# EAGLE board ZX_UNO_0_14 (EAGLE 6.5.0)
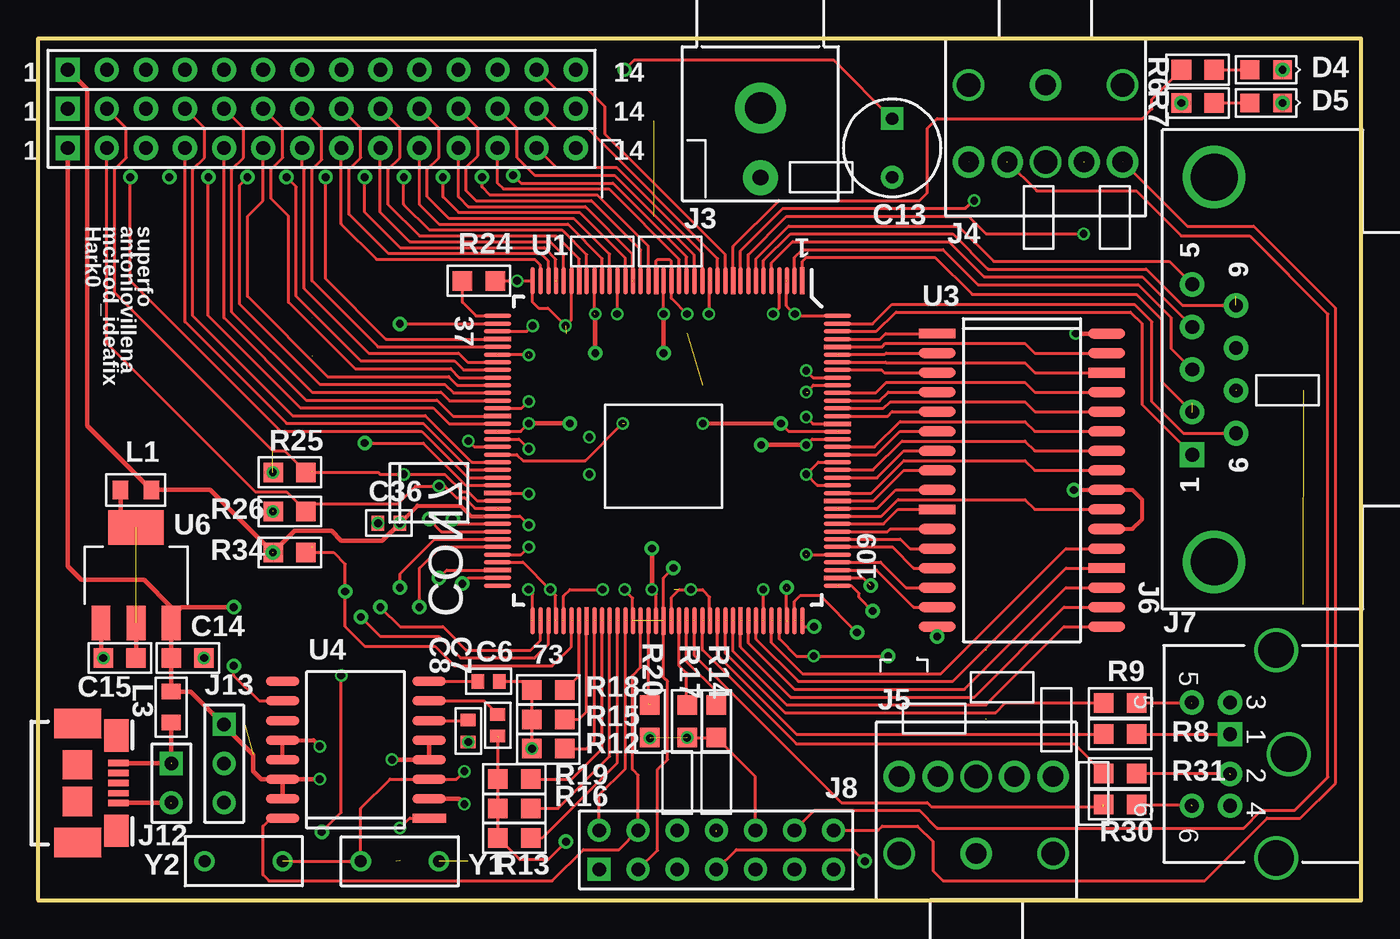
[diagram p0: board, top side]
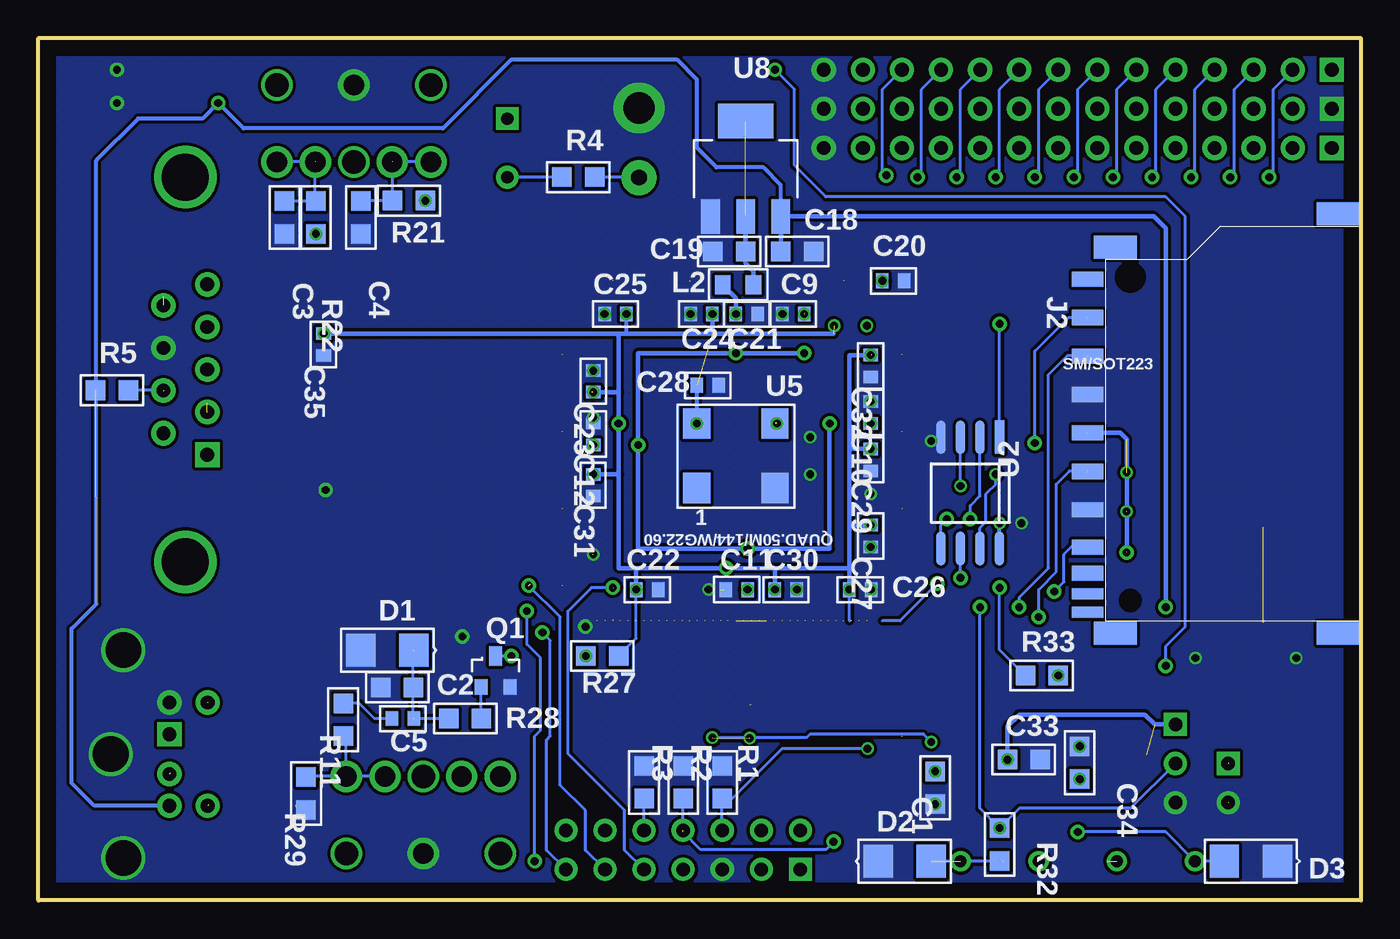
[diagram p1: board, bottom side, seen from below]

Size 85.98 x 56.01 mm. Coordinates in mm from the lower left corner, seen from the top.
Outline: 0,0 85.98,0 85.98,56.01 0,56.01 0,0
Copper layers (1*16): Top 0.035mm / dielectric 1.5mm / Bottom 0.035mm
Design rules "ZX_UNO_0_14": minimum track width 10mil, minimum drill 24mil, track to track 8mil, track to pad 8mil, pad to pad 8mil, via to via 8mil, smd to smd 8mil, copper to edge 40mil, drill to drill 8mil, minimum pad ring 0mil, minimum via ring 0mil, stop-mask expansion 4mil, vias tented up to drill 0mil, thermal gap 10mil

## Footprints (pad centres in the part's own frame; a part is rotated, then mirrored left to right if it is on the bottom)
SM/C_0805_3PRIMARY = smd 1.27 x 1.27: 1 0,0; 2 2.134,0
SM/C_0805_2PRIMARY = smd 1.27 x 1.27: 1 0,0; 2 -2.134,0
SM/C_0603_1PRIMARY = smd 0.813 x 0.965: 1 0,0; 2 1.422,0
SM/C_0603_2PRIMARY = smd 0.813 x 0.965: 1 0,0; 2 1.422,0
CYL/D.250/LS.150/.031_1PRIMARY = drill 0.787 pad 1.473 square: 1 0,0 | drill 0.787 pad 1.473: 2 3.81,0
SM/C_0805_1PRIMARY = smd 1.27 x 1.27: 1 0,0; 2 2.134,0
SM/DO213AA_21_1PRIMARY = smd 1.905 x 2.134: 1 0,0; 2 -3.454,0
SM/D_0805_21_1PRIMARY = smd 1.219 x 1.219: 1 0,0; 2 -2.134,0
MICRO_USB_609-4613-1-ND_1PRIMARY = smd 0.406 x 1.346: 1 -1.295,2.667; 2 -0.66,2.667; 3 0,2.667; 4 0.66,2.667; 5 1.295,2.667 | smd 1.905 x 3.048: 6 -3.861,0; 9 3.861,0 | smd 1.905 x 1.905: 7 -1.194,0; 8 1.194,0 | smd 2.108 x 1.6: 10 -3.099,2.54; 11 3.099,2.54
SD_101-00708-64-ND_1PRIMARY = smd 0.991 x 2.057: 1 -6.883,-2.794; 2 -4.369,-2.794; 3 -1.88,-2.794; 4 0.61,-2.794; 5 3.124,-2.794; 6 5.613,-2.794; 7 8.052,-2.794; 8 9.728,-2.794; 9 -9.373,-2.794 | smd 0.711 x 2.057: 10 11.074,-2.794; 11 12.268,-2.794 | drill 1.092 pad 1.092: 12 11.506,0 | drill 1.6 pad 1.6: 13 -9.5,0 | smd 1.499 x 2.794: 14 13.64,-0.991; 15 -11.455,-0.991; 16 13.64,13.513; 17 -13.64,13.513
RCA_JACK_RCJ-04X_1PRIMARY = drill 1.016 pad 2.286: 1 0,-4.521 | drill 2.032 pad 3.302: 2 0,0
AUDIO_JACK_STX-3120_1PRIMARY = drill 1.321 pad 2.032: 1 0,0; 2 5.004,-5.004; 3 2.489,-5.004; 4 -2.489,-5.004; 5 -5.004,-5.004 | drill 1.524 pad 2.032: 6 -5.004,0; 7 5.004,0; 8 0,-5.004
DSUB/RP.318/TM/9_1PRIMARY = drill 0.889 pad 1.6 square: 1 0,0 | drill 0.889 pad 1.6: 2 2.769,0; 3 5.537,0; 4 8.306,0; 5 11.074,0; 6 1.397,-2.845; 7 4.166,-2.845; 8 6.934,-2.845; 9 9.703,-2.845 | drill 3.048 pad 4.064: 10 -6.96,-1.422; 11 18.034,-1.422
DINC/MIN_TM/6_1PRIMARY = drill 0.889 pad 1.575 square: 1 -1.295,-8.509 | drill 0.889 pad 1.575: 2 1.295,-8.509; 3 -3.353,-8.509; 4 3.353,-8.509; 5 -3.353,-10.998; 6 3.353,-10.998 | drill 2.311 pad 2.845: 7 -6.756,-5.512; 8 0,-4.699; 9 6.756,-5.512
HDR2X7_1PRIMARY = drill 0.889 pad 1.499 square: 1 0,0 | drill 0.889 pad 1.499: 2 0,2.54; 3 2.54,0; 4 2.54,2.54; 5 5.08,0; 6 5.08,2.54; 7 7.62,0; 8 7.62,2.54; 9 10.16,0; 10 10.16,2.54; 11 12.7,0; 12 12.7,2.54; 13 15.24,0; 14 15.24,2.54
BLKCON.100/VH/TM1SQ/W.100/14_1PRIMARY = drill 0.889 pad 1.575 square: 1 0,0 | drill 0.889 pad 1.575: 2 2.54,0; 3 5.08,0; 4 7.62,0; 5 10.16,0; 6 12.7,0; 7 15.24,0; 8 17.78,0; 9 20.32,0; 10 22.86,0; 11 25.4,0; 12 27.94,0; 13 30.48,0; 14 33.02,0
HDR1X2_1PRIMARY = drill 0.889 pad 1.499 square: 1 0,0 | drill 0.889 pad 1.499: 2 2.54,0
HDR1X3_1PRIMARY = drill 0.889 pad 1.499 square: 1 0,0 | drill 0.889 pad 1.499: 2 2.54,0; 3 5.08,0
SM/L_0805_1PRIMARY = smd 1.016 x 1.219: 1 0,0; 2 2.007,0
SM/SOT23_231_1PRIMARY = smd 0.864 x 1.27: 1 0,0 | smd 0.864 x 1.016: 2 0.94,2.007; 3 -0.94,2.007
SM/R_0805_2PRIMARY = smd 1.27 x 1.27: 1 0,0; 2 -2.134,0
SM/R_0805_5PRIMARY = smd 1.27 x 1.27: 1 0,0; 2 2.134,0
SM/R_0805_1PRIMARY = smd 1.27 x 1.27: 1 0,0; 2 2.134,0
SM/R_0805_3PRIMARY = smd 1.27 x 1.27: 1 0,0; 2 2.134,0
SM/R_0805_4PRIMARY = smd 1.27 x 1.27: 1 0,0; 2 2.134,0
QUAD.50M/144/WG22.60_1PRIMARY = smd 0.279 x 1.778: 1 0,0; 2 0.508,0; 3 0.991,0; 4 1.499,0; 5 2.007,0; 6 2.515,0; 7 2.997,0; 8 3.505,0; 9 4.013,0; 10 4.496,0; 11 5.004,0; 12 5.512,0; 13 5.994,0; 14 6.502,0; 15 7.01,0; 16 7.518,0; 17 8.001,0; 18 8.509,0; 19 9.017,0; 20 9.5,0; 21 10.008,0; 22 10.516,0; 23 10.998,0; 24 11.506,0; 25 12.014,0; 26 12.522,0; 27 13.005,0; 28 13.513,0; 29 14.021,0; 30 14.503,0; 31 15.011,0; 32 15.519,0; 33 16.002,0; 34 16.51,0; 35 17.018,0; 36 17.526,0; 73 17.526,22.098; 74 17.018,22.098; 75 16.51,22.098; 76 16.002,22.098; 77 15.519,22.098; 78 15.011,22.098; 79 14.503,22.098; 80 14.021,22.098; 81 13.513,22.098; 82 13.005,22.098; 83 12.522,22.098; 84 12.014,22.098; 85 11.506,22.098; 86 10.998,22.098; 87 10.516,22.098; 88 10.008,22.098; 89 9.5,22.098; 90 9.017,22.098; 91 8.509,22.098; 92 8.001,22.098; 93 7.518,22.098; 94 7.01,22.098; 95 6.502,22.098; 96 5.994,22.098; 97 5.512,22.098; 98 5.004,22.098; 99 4.496,22.098; 100 4.013,22.098; 101 3.505,22.098; 102 2.997,22.098; 103 2.515,22.098; 104 2.007,22.098; 105 1.499,22.098; 106 0.991,22.098; 107 0.508,22.098; 108 0,22.098 | smd 1.778 x 0.279: 37 19.812,2.286; 38 19.812,2.794; 39 19.812,3.277; 40 19.812,3.785; 41 19.812,4.293; 42 19.812,4.801; 43 19.812,5.283; 44 19.812,5.791; 45 19.812,6.299; 46 19.812,6.782; 47 19.812,7.29; 48 19.812,7.798; 49 19.812,8.28; 50 19.812,8.788; 51 19.812,9.296; 52 19.812,9.804; 53 19.812,10.287; 54 19.812,10.795; 55 19.812,11.303; 56 19.812,11.786; 57 19.812,12.294; 58 19.812,12.802; 59 19.812,13.284; 60 19.812,13.792; 61 19.812,14.3; 62 19.812,14.808; 63 19.812,15.291; 64 19.812,15.799; 65 19.812,16.307; 66 19.812,16.789; 67 19.812,17.297; 68 19.812,17.805; 69 19.812,18.288; 70 19.812,18.796; 71 19.812,19.304; 72 19.812,19.812; 109 -2.286,19.812; 110 -2.286,19.304; 111 -2.286,18.796; 112 -2.286,18.288; 113 -2.286,17.805; 114 -2.286,17.297; 115 -2.286,16.789; 116 -2.286,16.307; 117 -2.286,15.799; 118 -2.286,15.291; 119 -2.286,14.808; 120 -2.286,14.3; 121 -2.286,13.792; 122 -2.286,13.284; 123 -2.286,12.802; 124 -2.286,12.294; 125 -2.286,11.786; 126 -2.286,11.303; 127 -2.286,10.795; 128 -2.286,10.287; 129 -2.286,9.804; 130 -2.286,9.296; 131 -2.286,8.788; 132 -2.286,8.28; 133 -2.286,7.798; 134 -2.286,7.29; 135 -2.286,6.782; 136 -2.286,6.299; 137 -2.286,5.791; 138 -2.286,5.283; 139 -2.286,4.801; 140 -2.286,4.293; 141 -2.286,3.785; 142 -2.286,3.277; 143 -2.286,2.794; 144 -2.286,2.286
SOJ.050/8/WB.300/L.200_1PRIMARY = smd 0.61 x 2.184: 1 0,0; 2 -1.27,0; 3 -2.54,0; 4 -3.81,0; 5 -3.81,-7.239; 6 -2.54,-7.239; 7 -1.27,-7.239; 8 0,-7.239
SOG.050/32/WG.480/L.825_1PRIMARY = smd 0.635 x 2.388: 1 0,0; 2 1.27,0; 3 2.54,0; 4 3.81,0; 5 5.08,0; 6 6.35,0; 7 7.62,0; 8 8.89,0; 9 10.16,0; 10 11.43,0; 11 12.7,0; 12 13.97,0; 13 15.24,0; 14 16.51,0; 15 17.78,0; 16 19.05,0; 17 19.05,11.024; 18 17.78,11.024; 19 16.51,11.024; 20 15.24,11.024; 21 13.97,11.024; 22 12.7,11.024; 23 11.43,11.024; 24 10.16,11.024; 25 8.89,11.024; 26 7.62,11.024; 27 6.35,11.024; 28 5.08,11.024; 29 3.81,11.024; 30 2.54,11.024; 31 1.27,11.024; 32 0,11.024
SOJ.050/16/WB.400/L.400_1PRIMARY = smd 0.61 x 2.184: 1 0,0; 2 1.27,0; 3 2.54,0; 4 3.81,0; 5 5.08,0; 6 6.35,0; 7 7.62,0; 8 8.89,0; 9 8.89,9.525; 10 7.62,9.525; 11 6.35,9.525; 12 5.08,9.525; 13 3.81,9.525; 14 2.54,9.525; 15 1.27,9.525; 16 0,9.525
SM/OSC_1PRIMARY = smd 1.778 x 1.981: 1 0,0; 2 -5.08,0; 3 -5.08,-4.191; 4 0,-4.191
SM/SOT223_2PRIMARY = smd 1.219 x 2.235: 1 0,0; 2 2.286,0; 3 4.572,0 | smd 3.607 x 2.235: 4 2.286,6.198
SM/SOT223_1PRIMARY = smd 1.219 x 2.235: 1 0,0; 2 -2.286,0; 3 -4.572,0 | smd 3.607 x 2.235: 4 -2.286,-6.198
RAD/.300X.125/LS.200/.031_1PRIMARY = drill 0.787 pad 1.321: 1 0,0; 2 5.08,0

## Placement (x,y rotation side)
C1  10pF  [SM/C_0805_3PRIMARY]  27.69,8.38 270 bottom
C2  10nF  [SM/C_0805_2PRIMARY]  63.73,13.84 180 bottom
C3  10nF  [SM/C_0805_2PRIMARY]  69.98,43.31 270 bottom
C4  10nF  [SM/C_0805_2PRIMARY]  65.02,43.31 270 bottom
C5  100nF  [SM/C_0603_1PRIMARY]  62.99,11.81 0 bottom
C6  100nF  [SM/C_0603_2PRIMARY]  29.97,14.22 180 top
C7  100nF  [SM/C_0603_2PRIMARY]  29.84,10.67 90 top
C8  100nF  [SM/C_0603_1PRIMARY]  27.94,10.29 90 top
C9  100nF  [SM/C_0603_1PRIMARY]  36.19,38.1 180 bottom
C10  100nF  [SM/C_0603_1PRIMARY]  31.88,30.99 90 bottom
C11  100nF  [SM/C_0603_1PRIMARY]  39.88,20.19 180 bottom
C12  100nF  [SM/C_0603_1PRIMARY]  49.91,29.59 90 bottom
C13  220uF  [CYL/D.250/LS.150/.031_1PRIMARY]  55.5,50.8 270 top
C14  4.7uF  [SM/C_0805_1PRIMARY]  8.64,15.75 0 top
C15  4.7uF  [SM/C_0805_1PRIMARY]  6.35,15.75 180 top
C18  4.7uF  [SM/C_0805_2PRIMARY]  37.72,42.16 180 bottom
C19  4.7uF  [SM/C_0805_2PRIMARY]  40,42.16 0 bottom
C20  100nF  [SM/C_0603_1PRIMARY]  31.11,40.26 0 bottom
C21  100nF  [SM/C_0603_1PRIMARY]  40.64,38.1 0 bottom
C22  100nF  [SM/C_0603_1PRIMARY]  47.12,20.19 0 bottom
C23  100nF  [SM/C_0603_1PRIMARY]  49.91,33.02 90 bottom
C24  100nF  [SM/C_0603_1PRIMARY]  42.16,38.1 180 bottom
C25  100nF  [SM/C_0603_1PRIMARY]  47.75,38.1 180 bottom
C26  100nF  [SM/C_0603_1PRIMARY]  33.27,20.19 0 bottom
C27  100nF  [SM/C_0603_1PRIMARY]  31.88,24.38 270 bottom
C28  100nF  [SM/C_0603_1PRIMARY]  43.18,33.48 0 bottom
C29  100nF  [SM/C_0603_1PRIMARY]  31.88,29.34 270 bottom
C30  100nF  [SM/C_0603_1PRIMARY]  38.1,20.19 0 bottom
C31  100nF  [SM/C_0603_1PRIMARY]  49.91,27.69 270 bottom
C32  100nF  [SM/C_0603_1PRIMARY]  31.88,35.43 270 bottom
C33  10uF  [SM/C_0805_1PRIMARY]  22.99,9.14 0 bottom
C34  10uF  [SM/C_0805_1PRIMARY]  18.29,7.87 90 bottom
C35  100nF  [SM/C_0603_1PRIMARY]  67.44,36.83 270 bottom
C36  100nF  [SM/C_0603_1PRIMARY]  23.49,24.51 180 top
D1  1N4148  [SM/DO213AA_21_1PRIMARY]  65.02,16.26 180 bottom
D2  1N4148  [SM/DO213AA_21_1PRIMARY]  27.94,2.54 0 bottom
D3  1N4148  [SM/DO213AA_21_1PRIMARY]  8.89,2.54 180 bottom
D4  LED  [SM/D_0805_21_1PRIMARY]  78.74,53.97 180 top
D5  LED  [SM/D_0805_21_1PRIMARY]  78.74,51.82 180 top
J1  microUSB  [MICRO_USB_609-4613-1-ND_1PRIMARY]  2.54,7.62 270 top
J2  SD  [SD_101-00708-64-ND_1PRIMARY]  14.99,30.99 270 bottom
J3  RCA  [RCA_JACK_RCJ-04X_1PRIMARY]  46.94,51.49 0 top
J4  Audio  [AUDIO_JACK_STX-3120_1PRIMARY]  65.48,52.98 0 top
J5  EAR  [AUDIO_JACK_STX-3120_1PRIMARY]  60.96,3.05 180 top
J6  JOYSTICK  [DSUB/RP.318/TM/9_1PRIMARY]  75.01,28.96 90 top
J7  KEYBOARD  [DINC/MIN_TM/6_1PRIMARY]  85.98,9.5 270 top
J8  Header_7X2  [HDR2X7_1PRIMARY]  36.45,2.01 0 top
J9  HEADER_14  [BLKCON.100/VH/TM1SQ/W.100/14_1PRIMARY]  1.91,48.9 0 top
J10  HEADER_14  [BLKCON.100/VH/TM1SQ/W.100/14_1PRIMARY]  1.91,51.44 0 top
J11  HEADER_14  [BLKCON.100/VH/TM1SQ/W.100/14_1PRIMARY]  1.91,53.97 0 top
J12  Header_2  [HDR1X2_1PRIMARY]  8.64,8.89 270 top
J13  Header_3  [HDR1X3_1PRIMARY]  12.06,11.43 270 top
L1  Inductor  [SM/L_0805_1PRIMARY]  5.33,26.67 0 top
L2  Inductor  [SM/L_0805_1PRIMARY]  39.5,40 180 bottom
L3  Inductor  [SM/L_0805_1PRIMARY]  8.64,11.56 90 top
Q1  BC846  [SM/SOT23_231_1PRIMARY]  56.26,15.88 180 bottom
R1  75  [SM/R_0805_2PRIMARY]  41.53,6.6 270 bottom
R2  75  [SM/R_0805_2PRIMARY]  44.07,6.6 270 bottom
R3  75  [SM/R_0805_5PRIMARY]  46.61,6.6 90 bottom
R4  75  [SM/R_0805_2PRIMARY]  51.94,46.99 180 bottom
R5  300  [SM/R_0805_2PRIMARY]  80.14,33.15 0 bottom
R6  300  [SM/R_0805_1PRIMARY]  74.29,53.97 0 top
R7  300  [SM/R_0805_3PRIMARY]  74.29,51.82 0 top
R8  270  [SM/R_0805_4PRIMARY]  71.37,10.8 180 top
R9  270  [SM/R_0805_4PRIMARY]  71.37,12.83 180 top
R11  470  [SM/R_0805_2PRIMARY]  66.17,10.67 270 bottom
R12  470  [SM/R_0805_1PRIMARY]  34.21,9.86 180 top
R13  470  [SM/R_0805_1PRIMARY]  32,4.06 180 top
R14  470  [SM/R_0805_4PRIMARY]  44.07,12.7 270 top
R15  1K  [SM/R_0805_4PRIMARY]  34.21,11.76 180 top
R16  1K  [SM/R_0805_4PRIMARY]  32,5.97 180 top
R17  1K  [SM/R_0805_4PRIMARY]  42.16,12.7 270 top
R18  2K  [SM/R_0805_4PRIMARY]  34.21,13.67 180 top
R19  2K  [SM/R_0805_4PRIMARY]  32,7.87 180 top
R20  2K  [SM/R_0805_1PRIMARY]  39.75,12.7 270 top
R21  3K9  [SM/R_0805_1PRIMARY]  60.83,45.47 180 bottom
R22  3K9  [SM/R_0805_1PRIMARY]  67.94,43.31 90 bottom
R24  4K7  [SM/R_0805_3PRIMARY]  27.56,40.26 0 top
R25  2K  [SM/R_0805_1PRIMARY]  17.4,27.81 180 top
R26  2K  [SM/R_0805_1PRIMARY]  17.4,25.27 180 top
R27  10K  [SM/R_0805_1PRIMARY]  48.26,15.88 180 bottom
R28  10K  [SM/R_0805_2PRIMARY]  59.31,11.81 180 bottom
R29  10K  [SM/R_0805_2PRIMARY]  68.58,8 90 bottom
R30  270  [SM/R_0805_1PRIMARY]  71.37,6.22 180 top
R31  270  [SM/R_0805_1PRIMARY]  71.37,8.25 180 top
R32  10K  [SM/R_0805_1PRIMARY]  23.49,4.7 270 bottom
R33  10K  [SM/R_0805_1PRIMARY]  19.69,14.61 180 bottom
R34  10K  [SM/R_0805_1PRIMARY]  17.4,22.61 180 top
U1  XC6SLX9/TFP144_1  [QUAD.50M/144/WG22.60_1PRIMARY]  49.66,40.26 180 top
U2  W25X40BV/W25Q80BV  [SOJ.050/8/WB.300/L.200_1PRIMARY]  23.49,30.1 0 bottom
U3  CY62148EV30  [SOG.050/32/WG.480/L.825_1PRIMARY]  58.42,36.83 270 top
U4  AD724  [SOJ.050/16/WB.400/L.400_1PRIMARY]  25.4,5.33 90 top
U5  50MHz  [SM/OSC_1PRIMARY]  43.18,26.8 180 bottom
U6  ZLDO1117G33TA  [SM/SOT223_2PRIMARY]  4.06,18.03 0 top
U8  ZLDO1117G12TA  [SM/SOT223_1PRIMARY]  42.29,44.45 180 bottom
Y1  3.58M  [RAD/.300X.125/LS.200/.031_1PRIMARY]  20.95,2.54 0 top
Y2  4.43M  [RAD/.300X.125/LS.200/.031_1PRIMARY]  15.88,2.54 180 top

## Library data of the parts
C1-C15 C18-C36 D1-D5 J1-J13 L1-L3 Q1 R1-R9 R11-R22 R24-R34 U1-U6 U8 Y1 Y2 = ZX_UNO_0_14

## Nets
1.2V: C9.1 C10.1 C11.1 C12.1 C21.1 L2.2 U1.19 U1.28 U1.52 U1.89 U1.128
3.3V: C20.1 C22.1 C23.1 C24.1 C25.1 C26.1 C27.1 C28.1 C29.1 C30.1 C31.1 C32.1 C35.1 C36.1 J2.4 J8.3 J11.1 L1.2 R24.2 R25.2 R26.2 R27.1 R34.2 U1.4 U1.18 U1.20 U1.31 U1.36 U1.42 U1.53 U1.63 U1.69 U1.76 U1.86 U1.90 U1.103 U1.122 U1.125 U1.129 U1.135 U2.8 U3.32 U5.4
5V: C14.1 C18.1 C33.1 C34.1 J7.4 J9.1 J13.1 L3.2 R5.2 R7.1 U4.4 U4.5 U4.14 U4.15 U6.3 U8.3
B: C6.1 J8.6 R1.1 R12.2 R15.2 R18.2
B0: R18.1 U1.79
B1: R15.1 U1.80
B2: R12.1 U1.81
CLK: U1.55 U5.3
CSYNC: J8.4 U1.87 U4.16
EAR: Q1.1 R27.2 U1.105
EXT1_WP_: J9.2 R26.1 U1.62 U2.3
EXT2_HOLD_: J10.2 R25.1 U1.61 U2.7
EXT3: J11.2 U1.58
EXT4_NC_: J9.3
EXT5_NC_: J10.3
EXT6_NC_: J11.3
EXT7: J9.4 U1.57
EXT8: J10.4 U1.56
EXT9: J11.4 U1.51
EXT10: J9.5 U1.50
EXT11: J10.5 U1.48
EXT12: J11.5 U1.47
EXT13: J9.6 U1.46
EXT14: J10.6 U1.45
EXT15: J11.6 U1.44
EXT16: J9.7 U1.43
EXT17: J10.7 U1.41
EXT18: J11.7 U1.40
EXT19: J9.8 U1.35
EXT20: J10.8 U1.34
EXT21: J11.8 U1.33
EXT22: J9.9 U1.32
EXT23: J10.9 U1.30
EXT24: J11.9 U1.29
EXT25: J9.10 U1.27
EXT26: J10.10 U1.26
EXT27: J11.10 U1.24
EXT28: J9.11 U1.23
EXT29: J10.11 U1.22
EXT30: J11.11 U1.21
EXT31: J9.12 U1.17
EXT32: J11.12 U1.16
EXT33: J10.12 U1.15
EXT34: J9.13 U1.14
EXT35: J10.13 U1.12
EXT36: J11.13 U1.11
FLASH_CS: U1.38 U2.1
FLASH_MISO: U1.65 U2.2
FLASH_MOSI: U1.64 U2.5
FLASH_SCK: U1.70 U2.6
G: C7.1 J8.8 R2.1 R13.2 R16.2 R19.2
G0: R19.1 U1.82
G1: R16.1 U1.83
G2: R13.1 U1.84
GND: C1.2 C2.1 C3.1 C4.1 C9.2 C10.2 C11.2 C12.2 C14.2 C15.2 C18.2 C19.2 C20.2 C21.2 C22.2 C23.2 C24.2 C25.2 C26.2 C27.2 C28.2 C29.2 C30.2 C31.2 C32.2 C33.2 C34.2 C35.2 C36.2 D1.1 D2.2 D3.2 D4.2 D5.2 J1.5 J2.3 J2.6 J3.2 J4.1 J5.1 J6.8 J7.3 J7.7 J7.8 J7.9 J8.5 J9.14 J10.1 J10.14 J11.14 J12.2 J13.3 Q1.3 R1.2 R2.2 R3.2 R29.2 U1.3 U1.13 U1.25 U1.49 U1.54 U1.60 U1.68 U1.73 U1.77 U1.91 U1.96 U1.108 U1.113 U1.130 U1.136 U1.144 U2.4 U3.16 U3.22 U3.24 U4.2 U4.12 U4.13 U5.2 U6.1 U8.1
JOY1: J6.5 U1.7
JOY2: J6.4 U1.5
JOY3: J6.3 U1.2
JOY4: J6.2 U1.1
JOY5: J6.9 U1.6
JOY6: J6.1 U1.142
JOY7: J6.6 U1.143
L-OUT: C3.2 J4.2 J4.3 J8.14 R22.2
LED: R6.1 U1.10
LEFT: R22.1 U1.8
NETC1_1: C1.1 U4.3 Y1.1 Y2.1
NETC2_2: C2.2 C5.2 D1.2 R28.1
NETC5_1: C5.1 R11.2
NETC6_2: C6.2 U4.8
NETC7_2: C7.2 U4.7
NETC8_2: C8.2 U4.6
NETC13_1: C13.1 U4.10
NETC13_2: C13.2 R4.1
NETC15_1: C15.1 L1.1 U6.2 U6.4
NETC19_1: C19.1 L2.1 U8.2 U8.4
NETD2_1: D2.1 R32.2 Y1.2
NETD3_1: D3.1 R33.1 Y2.2
NETD4_1: D4.1 R6.2
NETD5_1: D5.1 R7.2
NETJ1_1: J1.1 J12.1 L3.1
NETJ3_1: J3.1 R4.2
NETJ5_4: J5.4 J5.5 R11.1 R29.1
NETJ6_7: J6.7 R5.1
NETJ7_1: J7.1 R8.1
NETJ7_2: J7.2 R31.1
NETJ7_5: J7.5 R9.1
NETJ7_6: J7.6 R30.1
NETQ1_2: Q1.2 R28.2
NETR24_1: R24.1 U1.37
PS2_CLK: R9.2 U1.98
PS2_DATA: R8.2 U1.97
PS2_PIN2: R31.2 U1.95
PS2_PIN6: R30.2 U1.94
R: C8.1 J8.10 R3.1 R14.2 R17.2 R20.2
R0: R20.1 U1.88
R1: R17.1 U1.92
R2: R14.1 U1.93
R-OUT: C4.2 J4.4 J4.5 J8.12 R21.2
RIGHT: R21.1 U1.9
S$2: U1.71
S$3: U1.39
SD_CS: J2.1 U1.59
SD_MISO: J2.7 R34.1 U1.78
SD_MOSI: J2.2 U1.74
SD_SCK: J2.5 U1.75
STDN: J13.2 R32.1 U1.67 U4.1
STDNB: R33.2 U1.66
TCK: J8.7 U1.109
TDI: J8.11 U1.110
TDO: J8.9 U1.106
TMS: J8.13 U1.107
VSYNC: J8.2 U1.85
WR: U1.134 U3.29
XA0: U1.115 U3.12
XA1: U1.116 U3.11
XA2: U1.117 U3.10
XA3: U1.119 U3.9
XA4: U1.120 U3.8
XA5: U1.123 U3.7
XA6: U1.126 U3.6
XA7: U1.131 U3.5
XA8: U1.127 U3.27
XA9: U1.124 U3.26
XA10: U1.118 U3.23
XA11: U1.121 U3.25
XA12: U1.133 U3.4
XA13: U1.132 U3.28
XA14: U1.137 U3.3
XA15: U1.140 U3.31
XA16: U1.139 U3.2
XA17: U1.141 U3.1
XA18: U1.138 U3.30
XD0: U1.114 U3.13
XD1: U1.112 U3.14
XD2: U1.111 U3.15
XD3: U1.99 U3.17
XD4: U1.100 U3.18
XD5: U1.101 U3.19
XD6: U1.102 U3.20
XD7: U1.104 U3.21

## Tracks (layer width: path | path; a pad name or v marks a point on that pad's centre or on a via)
1.2V  (via drill 0.51 pad 0.81, 0.51 pad 0.94)  (3 unrouted)
  Top 0.203: C12.1 50.29,29.97 U1.128 | C11.1 40.16,19.91 40.16,18.19 | 36.14,38.15 U1.28 | C21.1 U1.19 | 29.84,30.48 31.34,30.48 C10.1
  Top 0.305: v46.99,29.59 C12.1 | v36.19,35.56 C9.1 | C11.1 v39.88,22.86 | C10.1 v34.54,30.99 | v40.64,35.56 C21.1
  Bottom 0.305: C21.1 40.64,39.14 L2.2 | v36.19,35.56 v40.64,35.56 46.99,35.56 v46.99,29.59 46.99,22.86 v39.88,22.86 34.54,22.86 v34.54,30.99
  other vias: 36.19,38.1 39.88,20.19 49.91,29.59 40.64,38.1 31.88,30.99
3.3V  (via drill 0.51 pad 0.81, 0.51 pad 0.94)  (16 unrouted)
  Top 0.203: v48.26,30.99 48.77,30.48 51.94,30.48 | v41.27,21.59 40.64,20.95 40.64,14.48 40.89,14.22 40.89,9.14 40.26,8.51 40.26,3.25 J8.3 | U1.4 48.16,38.51 C25.1 | U1.135 50.37,33.48 C23.1 | U1.125 50.7,28.47 C31.1 50.62,26.97 U1.122 | 47.14,18.19 47.14,20.17 C22.1 | 38.63,18.19 38.63,19.63 C30.1 | 33.63,18.19 33.63,19.81 C26.1 31.5,21.97 U1.69 | U1.63 31.29,24.97 C27.1 | 29.84,35.48 31.83,35.48 | U1.31 34.65,37.72 v34.26,37.34 33.12,38.48 32.51,38.48 32.13,38.86 U1.36 C20.1 R24.2 | C24.1 41.15,39.12 U1.18 41.15,41.53 41.02,41.66 40.26,41.66 40.16,41.55 U1.20 | U1.53 31.24,29.97 C29.1
  Top 0.254: U5.4 v48.26,30.99 | U1.63 28.12,24.97 27.43,25.65 24.64,25.65 C36.1
  Top 0.305: C35.1 U3.32 | J11.1 3.17,52.7 3.17,30.84 L1.2 11.18,26.67 v15.24,22.61 | R34.2 16.66,24 19.05,24 19.68,23.37 22.35,23.37 C36.1
  Bottom 0.203: 33.25,18.16 33.25,20.17 | C22.1 47.12,17.02 R27.1
  Bottom 0.254: U5.4 C28.1 | 47.75,36.83 C25.1 | U2.8 C36.1
  Bottom 0.305: 48.26,36.83 47.75,36.83 34.29,36.83 | 48.26,36.83 C35.1 | 47.12,21.59 v41.27,21.59 38.1,21.59 | C22.1 47.12,21.59 | 47.12,21.59 48.26,21.59 48.26,27.69 | 48.26,27.69 C31.1 | C32.1 33.27,35.43 33.27,29.34 | C30.1 38.1,21.59 | C27.1 33.27,24.38 | 33.27,24.38 33.27,29.34 | C26.1 33.27,21.59 | 33.27,21.59 33.27,24.38 | 33.27,21.59 38.1,21.59 | 50.04,33.02 50.04,32.89 49.91,32.77 49.66,33.02 48.26,33.02 | 48.26,33.02 48.26,36.83 | 48.26,27.69 v48.26,30.99 48.26,33.02 | 42.16,36.86 C24.1 | C29.1 33.27,29.34 | v15.24,22.61 v15.24,25.27 15.24,29.97 15.65,30.38 17.81,30.38
  other vias: 15.24,27.81 67.44,36.83 43.18,30.99 47.75,38.1 31.88,35.43 31.88,24.38 33.27,20.19 38.1,20.19 47.12,20.19 49.91,27.69 49.91,33.02 31.11,40.26 42.16,38.1 31.88,29.34 23.49,24.51
5V  (via drill 0.51 pad 0.81, 0.51 pad 0.94)  (2 unrouted)
  Top 0.305: U4.5 U4.4 C33.1 | U4.14 14.48,7.87 13.97,8.38 13.97,9.47 9.88,13.56 L3.2 C14.1 U6.3 8.64,18.41 | U4.14 C34.1 | v12.7,19.05 9.27,19.05 8.64,18.41 | 8.64,18.41 8.64,19.05 6.86,20.83 2.79,20.83 1.9,21.72 J9.1 | U4.15 U4.14
  Bottom 0.254: U8.3 37.72,46.48 38.86,47.62 41.91,47.62 43.18,48.89 43.18,53.34 44.45,54.61 55.24,54.61 59.69,50.16 72.64,50.16 R7.1 75.31,50.8 79.5,50.8 82.22,48.08 82.22,19.25 83.82,17.65 83.82,7.62 82.35,6.15 J7.4
  Bottom 0.305: J13.1 13.41,11.43 14.05,12.06 22.22,12.06 22.99,11.3 C33.1 | v12.7,19.05 12.7,43.69 13.46,44.45 U8.3 C18.1 | 77.42,6.15 J7.4
  other vias: 18.29,7.87 22.99,9.14 74.29,51.82
B  (via drill 0.51 pad 0.81)
  Top 0.203: C6.1 31.52,14.22 R18.2 R15.2 R12.2
  Bottom 0.203: R12.2 37.64,9.86 40.89,6.6 R1.1 J8.6
  other vias: 32.08,9.86
B0  (1 unrouted)
  Top 0.203: 35.15,18.19 35.15,14.6 R18.1
B1  (1 unrouted)
  Top 0.203: 35.64,18.19 35.64,12.27 35.13,11.76 R15.1
B2  (1 unrouted)
  Top 0.203: 36.14,18.19 36.14,10.36 35.64,9.86 R12.1
CLK  (via drill 0.51 pad 0.81)  (1 unrouted)
  Top 0.203: v37.97,30.99 35.56,28.57 31.5,28.57 31.09,28.96 U1.55
CSYNC  (1 unrouted)
  Top 0.203: U4.16 15.11,5.33 14.6,4.83 14.6,1.65 14.99,1.27 33.4,1.27 35.43,3.3 37.74,3.3 J8.4 38.99,8.13 38.61,8.51 38.61,14.6 39.14,15.14 39.14,18.19
EAR  (via drill 0.51 pad 0.81, 0.51 pad 0.94)  (1 unrouted)
  Top 0.203: v55.24,15.87 R27.2 49.28,15.87 48.16,16.99 48.16,18.19
  Bottom 0.203: v55.24,15.87 Q1.1
  other vias: 50.39,15.88
EXT1_WP_  (via drill 0.51 pad 0.81)  (1 unrouted)
  Top 0.203: J9.2 4.44,36.19 14.1,26.54 16.13,26.54 R26.1 17.91,25.78 23.37,25.78 24.51,26.92 v26.03,26.92 26.42,26.92 27.18,26.16 27.69,26.16 28.37,25.48 29.84,25.48
  Bottom 0.203: v26.03,26.92 U2.3
EXT2_HOLD_  (via drill 0.51 pad 0.81)
  Top 0.203: U1.61 28.52,25.96 27.94,26.54 27.56,26.54 26.42,27.69 v23.75,27.69 22.22,27.69 22.1,27.81 R25.1 16,29.21 15.24,29.21 4.95,39.5 4.95,47.5 5.71,48.26 5.71,50.16 J10.2
  Bottom 0.203: U2.7 24.76,24.21 24.38,24.59 24.38,26.42 23.75,27.05 v23.75,27.69
EXT3  (via drill 0.51 pad 0.94)
  Top 0.203: v5.97,46.99 5.97,40.26 15.75,30.48 24.89,30.48 27.91,27.46 U1.58
  Bottom 0.203: v5.97,46.99 5.71,47.24 5.71,52.7 J11.2
EXT6_NC_  (via drill 0.51 pad 0.94)
  Bottom 0.203: J11.3 8.25,52.7 8.25,47.24 v8.51,46.99
EXT7
  Top 0.203: J9.4 9.52,37.59 16.13,30.99 25.02,30.99 28.04,27.97 U1.57
EXT8
  Top 0.203: U1.56 28.17,28.47 25.15,31.5 16.51,31.5 10.03,37.97 10.03,47.5 10.79,48.26 10.79,50.16 J10.4
EXT9  (via drill 0.51 pad 0.94)
  Top 0.203: U1.51 26.7,30.96 25.65,32 17.02,32 11.05,37.97 v11.05,46.99
  Bottom 0.203: J11.4 10.79,52.7 10.79,47.24 v11.05,46.99
EXT10
  Top 0.203: U1.50 26.95,31.47 25.91,32.51 17.4,32.51 12.06,37.85 J9.5
EXT11
  Top 0.203: U1.48 26.72,32.46 26.16,33.02 17.78,33.02 12.57,38.23 12.57,47.5 13.33,48.26 13.33,50.16 J10.5
EXT12  (via drill 0.51 pad 0.94)
  Top 0.203: v13.59,46.99 13.08,46.48 13.08,38.73 18.29,33.53 26.42,33.53 26.97,32.97 U1.47
  Bottom 0.203: J11.5 13.33,52.7 13.33,47.24 v13.59,46.99
EXT13
  Top 0.203: J9.6 14.6,45.47 13.59,44.45 13.59,39.24 18.8,34.04 26.67,34.04 27.23,33.48 U1.46
EXT14
  Top 0.203: J10.6 15.87,50.16 15.87,48.26 15.11,47.5 15.11,45.59 16.26,44.45 16.26,38.86 20.57,34.54 26.8,34.54 27.36,33.96 U1.45
EXT15  (via drill 0.51 pad 0.94)
  Top 0.203: v16.13,46.99 16.76,46.35 16.76,39.24 20.95,35.05 27.05,35.05 27.64,34.47 U1.44
  Bottom 0.203: J11.6 15.87,52.7 15.87,47.24 v16.13,46.99
EXT16
  Top 0.203: J9.7 17.14,47.62 17.27,47.5 17.27,39.75 21.46,35.56 27.3,35.56 27.89,34.98 U1.43
EXT17
  Top 0.203: U1.41 22.07,35.97 17.78,40.26 17.78,47.5 18.41,48.13 18.41,50.16 J10.7
EXT18  (via drill 0.51 pad 0.94)
  Top 0.203: U1.40 22.58,36.47 18.67,40.39 v18.67,46.99
  Bottom 0.203: J11.7 18.41,52.7 18.41,47.24 v18.67,46.99
EXT19
  Top 0.203: J9.8 19.68,43.94 21.97,41.66 32.26,41.66 32.64,41.27 U1.35
EXT20
  Top 0.203: U1.34 33.15,41.53 32.64,42.04 22.73,42.04 20.19,44.58 20.19,47.5 20.95,48.26 20.95,50.16 J10.8
EXT21  (via drill 0.51 pad 0.94)  (1 unrouted)
  Top 0.203: v21.21,46.99 21.21,44.7 23.49,42.42 32.89,42.42 33.63,41.66 33.63,40.26
  Bottom 0.203: v21.21,46.99 20.95,47.24 20.95,52.7 J11.8
EXT22
  Top 0.203: J9.9 22.22,44.7 24.13,42.8 33.27,42.8 34.14,41.94 U1.32
EXT23
  Top 0.203: U1.30 35.15,41.68 33.65,43.18 24.76,43.18 22.73,45.21 22.73,47.5 23.49,48.26 23.49,50.16 J10.9
EXT24  (via drill 0.51 pad 0.94)
  Top 0.203: v23.75,46.99 23.75,45.21 25.4,43.56 34.04,43.56 35.64,41.96 U1.29
  Bottom 0.203: v23.75,46.99 23.49,47.24 23.49,52.7 J11.9
EXT25
  Top 0.203: J9.10 24.76,45.21 26.03,43.94 34.42,43.94 36.65,41.71 U1.27
EXT26
  Top 0.203: U1.26 37.13,41.99 34.8,44.32 26.67,44.32 25.27,45.72 25.27,47.5 26.03,48.26 26.03,50.16 J10.10
EXT27  (via drill 0.51 pad 0.94)
  Top 0.203: v26.29,46.99 26.29,45.72 27.3,44.7 35.18,44.7 38.15,41.73 U1.24
  Bottom 0.203: v26.29,46.99 26.03,47.24 26.03,52.7 J11.10
EXT28  (1 unrouted)
  Top 0.203: 38.63,40.26 38.63,41.99 35.56,45.08 27.94,45.08 27.3,45.72 J9.11
EXT29
  Top 0.203: U1.22 39.14,42.27 35.94,45.47 28.45,45.47 27.81,46.1 27.81,47.62 28.57,48.39 28.57,50.16 J10.11
EXT30  (via drill 0.51 pad 0.94)
  Top 0.203: v28.83,46.99 28.83,46.35 29.34,45.85 36.32,45.85 39.65,42.52 U1.21
  Bottom 0.203: v28.83,46.99 28.57,47.24 28.57,52.7 J11.11
EXT31
  Top 0.203: J9.12 29.84,46.61 30.23,46.23 37.08,46.23 41.66,41.66 U1.17
EXT32  (via drill 0.51 pad 0.94)
  Top 0.203: v30.86,47.12 31.37,46.61 37.34,46.61 42.14,41.81 U1.16
  Bottom 0.203: J11.12 31.11,52.7 31.11,47.37 v30.86,47.12
EXT33
  Top 0.203: J10.12 31.11,50.16 31.11,48.26 32.26,47.12 37.46,47.12 42.65,41.94 U1.15
EXT34
  Top 0.203: J9.13 33.65,47.62 37.59,47.62 43.15,42.06 U1.14
EXT35
  Top 0.203: J10.13 33.65,50.16 35.69,50.16 44.15,41.71 U1.12
EXT36
  Top 0.203: U1.11 44.65,41.96 36.83,49.78 36.83,51.56 35.69,52.7 33.65,52.7 J11.13
FLASH_CS  (via drill 0.51 pad 0.94)
  Top 0.203: v23.49,37.46 U1.38
  Bottom 0.203: U2.1 v23.49,37.46
FLASH_MISO  (via drill 0.51 pad 0.94)
  Top 0.203: v25.4,24.76 26.19,23.95 U1.65
  Bottom 0.203: v25.4,24.76 25.4,25.65 24.76,26.29 U2.2
FLASH_MOSI  (via drill 0.51 pad 0.94)
  Top 0.203: v26.92,24.76 27.23,24.46 U1.64
  Bottom 0.203: U2.5 27.3,24.38 v26.92,24.76
FLASH_SCK  (via drill 0.51 pad 0.94)
  Top 0.203: v26.03,20.95 26.54,21.46 U1.70
  Bottom 0.203: v26.03,20.95 U2.6
G  (via drill 0.51 pad 0.94)  (2 unrouted)
  Top 0.203: v34.29,3.81 33.15,2.67 31.27,2.67 R13.2 R16.2 R19.2 29.87,10.64
  Bottom 0.203: v34.29,3.81 34.8,3.3 42.93,3.3 44.07,4.44 | J8.8 R2.1
G0  (1 unrouted)
  Top 0.203: 36.65,18.19 36.65,9.86 34.67,7.87 R19.1
G1  (1 unrouted)
  Top 0.203: 37.13,18.19 37.13,9.35 33.78,5.97 R16.1
G2  (1 unrouted)
  Top 0.203: 37.64,18.19 37.64,8.94 32.77,4.06 R13.1
GND  (via drill 0.51 pad 0.81, 0.51 pad 0.94)  (10 unrouted)
  Top 0.203: v27.94,29.84 28.32,29.46 U1.54 | v49.91,31.39 50.34,30.96 U1.130 | 49.94,22.45 U1.113 | 41.15,18.19 41.15,19.68 41.66,20.19 43.18,20.19 43.64,19.71 43.64,18.19 | 52.45,37.97 U1.144 49.3,37.97 C25.2 48.64,38.61 48.64,40.26 | 49.66,18.19 49.66,17.78 v50.42,17.78 | U1.136 50.34,33.96 v49.91,34.42 | 32.13,18.19 32.13,19.91 C26.2 | U1.68 31.37,22.45 C27.2 | U1.25 37.64,38.13 C9.2 | 34.14,18.19 34.14,19.79 34.54,20.19 C30.2 | 43.64,40.26 43.64,38.18 C24.2 | U1.49 31.42,31.98 C10.2 | U1.60 31.83,26.47 v31.88,26.42
  Top 0.254: C34.2 17.88,10.41 U4.12 U4.13 | v67.31,26.67 U3.24 71.12,26.67 71.75,26.03 71.75,24.76 71.12,24.13 U3.22 | v58.42,17.14 U3.16
  Top 0.305: C1.2 27.33,6.6 U4.2 | J1.5 8.61,6.32 | C15.2 4.06,15.9 U6.1
  other vias: 27.69,6.25 18.29,10.01 35.81,27.69 35.81,30.1 80.87,53.97 80.87,51.82 49.91,22.48 49.17,38.1 37.62,38.1 31.88,32.41 31.88,22.96 31.85,20.19 42.42,20.19 36.68,20.19 43.59,38.1 22.07,24.51 10.77,15.75 4.22,15.75
  pour Bottom (no thermals, hatched): 85.34,0.68 0.63,0.68 0.63,55.29 85.34,55.29
JOY1
  Top 0.203: U1.7 46.66,41.71 48.77,43.81 59.82,43.81 62.1,41.53 73.51,41.53 J6.5
JOY2
  Top 0.203: U1.5 47.65,41.43 49.02,42.8 59.18,42.8 61.47,40.51 71.75,40.51 J6.4
JOY3
  Top 0.203: U1.2 49.15,41.78 49.66,42.29 58.8,42.29 61.09,40 71.5,40 73.66,37.85 73.66,35.84 J6.3
JOY4  (1 unrouted)
  Top 0.203: J6.2 73.02,33.71 73.02,37.72 71.37,39.37 60.71,39.37 58.29,41.78 49.91,41.78 49.66,41.53 U1.1
  Bottom 0.203: 75.01,32.33 75.01,32.38
JOY5  (1 unrouted)
  Top 0.203: U1.6 47.14,41.58 48.89,43.31 59.44,43.31 61.72,41.02 72.01,41.02 74.37,38.66 J6.9
  Bottom 0.203: 77.85,39.27 78,39.27
JOY6
  Top 0.203: J6.1 71.75,32.21 71.75,37.46 70.99,38.23 55.75,38.23 54.48,36.98 U1.142
JOY7
  Top 0.203: J6.6 74.42,30.35 72.39,32.38 72.39,37.59 71.25,38.73 55.5,38.73 54.23,37.46 U1.143 51.94,37.49
L-OUT  (3 unrouted)
  Top 0.203: 70.48,48.01 74.68,43.81 78.99,43.81 84.33,38.48 84.33,7.62 82.04,5.33 79.88,5.33 75.82,1.27 58.8,1.27 58.17,1.9 58.17,3.81 57.15,4.83 54.86,4.83 54.58,4.55 J8.14
  Bottom 0.203: C3.2 R22.2 68,45.49 68,48.01 70.48,48.01
LED
  Top 0.203: R6.1 72.39,52.07 72.39,51.43 71.75,50.8 58.42,50.8 57.78,50.16 57.78,45.97 57.28,45.47 48.13,45.47 45.16,42.49 U1.10
LEFT  (via drill 0.51 pad 0.81)
  Top 0.203: U1.8 46.15,41.96 48.64,44.45 60.45,44.45 61.59,43.31 R22.1
  other vias: 67.94,43.31
NETC1_1  (via drill 0.51 pad 0.81)  (1 unrouted)
  Top 0.203: 16.51,2.54 Y1.1 20.95,5.97 22.86,7.87 U4.3 27.18,7.87 C1.1
  other vias: 27.69,8.38
NETC2_2  (2 unrouted)
  Bottom 0.203: 61.62,16.26 61.62,13.87 C2.2 61.62,13.82 61.62,11.81 R28.1
NETC5_1
  Bottom 0.203: R11.2 65.13,12.8 64.13,11.81 C5.1
NETC6_2
  Top 0.203: U4.8 C6.2
NETC7_2
  Top 0.203: C7.2 28.98,12.95 U4.7
NETC8_2
  Top 0.203: U4.6 27.91,11.68 C8.2
NETC13_1  (via drill 0.51 pad 0.94)
  Top 0.203: U4.10 14.35,12.95 12.7,14.6 v12.7,15.24 | C13.1 51.69,54.61 38.73,54.61 v38.1,53.97
  Bottom 0.203: v12.7,15.24 12.7,16.51 11.43,17.78 11.43,44.45 12.7,45.72 34.8,45.72 36.83,47.75 36.83,52.7 v38.1,53.97
NETC13_2
  Bottom 0.203: R4.1 C13.2
NETC15_1  (1 unrouted)
  Top 0.305: U6.4 5.33,25.25 L1.1 | C15.1 U6.2
NETC19_1  (1 unrouted)
  Bottom 0.305: L2.1 39.5,40.89 40,41.4 C19.1 U8.2
NETD2_1  (2 unrouted)
  Bottom 0.203: 23.27,2.54 D2.1
NETD3_1  (via drill 0.51 pad 0.81, 0.51 pad 0.94)
  Top 0.203: v18.41,4.44 19.68,5.71 R33.1
  Bottom 0.203: v18.41,4.44 12.7,4.44 Y2.2 D3.1
  other vias: 19.69,14.61
NETD4_1
  Top 0.203: R6.2 D4.1
NETD5_1
  Top 0.203: R7.2 D5.1
NETJ1_1  (1 unrouted)
  Top 0.305: L3.1 8.64,8.94 8.61,8.92 J1.1
NETJ3_1
  Bottom 0.203: J3.1 46.96,46.99 R4.2
NETJ5_4
  Bottom 0.203: J5.5 65.96,10.46 R11.1 | R29.1 68.53,8.05 J5.5 | J5.4 J5.5
NETJ6_7  (1 unrouted)
  Bottom 0.203: 77.88,33.15 R5.1
NETJ7_1
  Top 0.203: R8.1 J7.1
NETJ7_2  (1 unrouted)
  Top 0.203: R31.1 77.42,8.25
NETJ7_5  (1 unrouted)
  Top 0.203: R9.1 74.96,12.83
NETJ7_6  (1 unrouted)
  Top 0.203: R30.1 74.9,6.22
NETQ1_2
  Bottom 0.203: R28.2 57.2,11.84 Q1.2
NETR24_1
  Top 0.203: U1.37 28.45,37.97 27.56,38.86 R24.1
PS2_CLK  (1 unrouted)
  Top 0.203: R9.2 62.86,12.83 62.23,12.19 48.51,12.19 44.65,16.05 44.65,18.19
PS2_DATA  (1 unrouted)
  Top 0.203: R8.2 49.28,10.79 44.15,15.93 44.15,18.19
PS2_PIN2  (1 unrouted)
  Top 0.203: R31.2 67.34,10.16 49.28,10.16 43.15,16.28 43.15,18.19
PS2_PIN6  (2 unrouted)
  Top 0.203: 69.24,6.1 58.04,6.1 57.78,6.35 52.2,6.35 42.65,15.9 42.65,18.19
R  (via drill 0.51 pad 0.81)  (2 unrouted)
  Top 0.203: J8.10 46.61,8.03 R14.2 R17.2
  Bottom 0.203: R17.2 36.04,10.57 35.81,10.79 28.45,10.79 C8.1 | J8.10 R3.1
  other vias: 39.75,10.54 42.16,10.57 27.94,10.29
R0  (2 unrouted)
  Top 0.203: 39.65,12.73 39.65,18.19
R1  (1 unrouted)
  Top 0.203: R17.1 42.14,12.7 42.14,14.76 41.66,15.24 41.66,18.19
R2  (1 unrouted)
  Top 0.203: R14.1 44.07,13.59 42.14,15.52 42.14,18.19
R-OUT  (3 unrouted)
  Top 0.203: 62.99,48.01 64.9,46.1 71.37,46.1 74.29,43.18 78.74,43.18 83.82,38.1 83.82,8 81.66,5.84 79.5,5.84 78.36,4.7 58.42,4.7 57.28,5.84 50.44,5.84 J8.12
  Bottom 0.203: C4.2 65,45.47 R21.2 62.97,47.98 62.99,48.01 60.5,48.01
RIGHT  (via drill 0.51 pad 0.81)
  Top 0.203: U1.9 45.64,42.21 48.39,44.96 60.27,44.96 R21.1
  other vias: 60.83,45.47
S$2  (via drill 0.51 pad 0.94)
  Top 0.203: U1.71 27.94,20.95 v27.56,20.57
  Bottom 0.203: v27.56,20.57 29.97,18.16 31.11,18.16
S$3  (via drill 0.51 pad 0.81)
  Top 0.203: U1.39 31.75,36.98 v32.13,37.34
SD_CS  (via drill 0.51 pad 0.94)  (1 unrouted)
  Top 0.203: v21.21,29.72 25.02,29.72 27.76,26.97 U1.59
  Bottom 0.203: v21.21,29.72 21.21,35.69 19.02,37.87 17.81,37.87
SD_MISO  (via drill 0.51 pad 0.94)  (2 unrouted)
  Top 0.203: 34.65,18.19 34.65,16.48 33.4,15.24 27.05,15.24 25.78,16.51 21.21,16.51 19.94,17.78 v19.94,20.07 19.94,21.84 19.18,22.61 R34.1
  Bottom 0.203: 17.81,22.96 18.82,22.96 19.3,22.48 19.3,20.7 v19.94,20.07 19.94,19.68
SD_MOSI  (via drill 0.51 pad 0.94)  (2 unrouted)
  Top 0.203: v22.22,19.05 23.49,17.78 26.29,17.78 27.81,16.26 32,16.26 32.64,16.89 32.64,18.19
  Bottom 0.203: v22.22,19.05 22.22,19.68 20.32,21.59 20.32,34.16 19.1,35.38 17.81,35.38
SD_SCK  (via drill 0.51 pad 0.94)  (2 unrouted)
  Top 0.203: v20.95,18.41 22.22,17.14 26.03,17.14 27.43,15.75 32.26,15.75 33.15,16.64 33.15,18.19
  Bottom 0.203: v20.95,18.41 20.95,20.19 19.81,21.34 19.81,27.05 18.97,27.89 17.81,27.89
STDN  (via drill 0.51 pad 0.81, 0.51 pad 0.94)
  Top 0.203: U4.1 24.13,5.33 R32.1 23.24,4.7 | v24.76,19.05 24.76,21.59 26.14,22.96 U1.67
  Bottom 0.203: v24.76,19.05 24.76,5.97 R32.1 22.22,5.97 14.99,5.97 J13.2
  other vias: 23.49,4.7
STDNB  (via drill 0.51 pad 0.94)
  Top 0.203: v23.49,20.32 23.49,21.21 25.76,23.47 U1.66
  Bottom 0.203: R33.2 23.49,16.28 v23.49,20.32
TCK  (via drill 0.51 pad 0.94)  (1 unrouted)
  Top 0.203: v54.23,18.8 53.34,19.68 53.34,19.94 52.81,20.47 51.94,20.47 | v53.72,2.54 52.96,3.3 45.36,3.3 J8.7
  Bottom 0.203: v53.72,2.54 53.72,10.67 53.34,11.05 53.34,15.75 54.23,16.64 v54.23,18.8
TDI  (via drill 0.51 pad 0.94)  (1 unrouted)
  Top 0.203: v54.1,20.45 53.59,20.95 U1.110
  Bottom 0.203: v54.1,20.45 52.07,18.41 52.07,7.49 50.42,5.84 50.42,3.25 J8.11 | 53.97,20.57 53.97,20.68
TDO  (via drill 0.51 pad 0.94)  (2 unrouted)
  Top 0.203: 48.64,18.19 48.64,20.29
  Bottom 0.203: J8.9 47.88,3.25 47.88,5.84 51.56,9.52 51.56,18.8 50.04,20.32 v48.64,20.32
TMS  (via drill 0.51 pad 0.94)  (1 unrouted)
  Top 0.203: v53.21,17.4 50.8,19.81 49.53,19.81 49.15,19.43 49.15,18.19
  Bottom 0.203: v53.21,17.4 52.7,16.89 52.7,10.67 52.96,10.41 52.96,3.25 J8.13
VSYNC  (1 unrouted)
  Top 0.203: J8.2 36.45,6.86 38.15,8.56 38.15,18.19
WR
  Top 0.203: U3.29 64.77,33.02 64.13,33.65 55.12,33.65 54.43,32.97 U1.134
XA0
  Top 0.203: U1.115 56.03,23.47 56.64,22.86 U3.12
XA1
  Top 0.203: U3.11 55.37,24.13 55.19,23.95 U1.116
XA2
  Top 0.203: U3.10 55.88,25.4 54.94,24.46 U1.117
XA3  (1 unrouted)
  Top 0.203: U3.9 55.75,26.67 54.53,25.48 51.94,25.48
XA4
  Top 0.203: U3.8 56.26,27.94 54.28,25.96 U1.120
XA5
  Top 0.203: U3.7 56.26,29.21 54.51,27.46 U1.123
XA6
  Top 0.203: U3.6 56.01,30.48 54.48,28.96 U1.126
XA7
  Top 0.203: U1.131 55.22,31.47 55.5,31.75 U3.5
XA8
  Top 0.203: U1.127 54.36,29.46 56.01,31.11 64.13,31.11 64.77,30.48 U3.27
XA9
  Top 0.203: U1.124 54.25,27.97 56.13,29.84 64.13,29.84 64.77,29.21 U3.26
XA10
  Top 0.203: U1.118 54.81,24.97 55.88,26.03 64.13,26.03 64.77,25.4 U3.23
XA11
  Top 0.203: U1.121 54.15,26.47 56.26,28.57 64.13,28.57 64.77,27.94 U3.25
XA12
  Top 0.203: U1.133 54.69,32.46 55.24,33.02 U3.4
XA13
  Top 0.203: U3.28 64.77,31.75 64.13,32.38 55.37,32.38 54.94,31.98 U1.132
XA14
  Top 0.203: U3.3 54.99,34.29 54.81,34.47 U1.137
XA15
  Top 0.203: U3.31 64.77,35.56 64.13,36.19 55.04,36.19 54.84,35.97 U1.140
XA16  (1 unrouted)
  Top 0.203: 51.94,35.48 55.02,35.48 55.12,35.56 U3.2
XA17
  Top 0.203: U1.141 54.71,36.47 55.07,36.83 U3.1
XA18
  Top 0.203: U3.30 64.77,34.29 64.13,34.92 55.12,34.92 55.07,34.98 U1.138
XD0
  Top 0.203: U1.114 55.52,22.96 56.9,21.59 U3.13
XD1
  Top 0.203: U1.112 54.74,21.97 56.39,20.32 U3.14
XD2
  Top 0.203: U1.111 54.48,21.46 56.9,19.05 U3.15
XD3  (1 unrouted)
  Top 0.203: 45.16,18.19 45.16,16.18 48.64,12.7 61.59,12.7 66.67,17.78 U3.17
XD4  (1 unrouted)
  Top 0.203: U3.18 66.67,19.05 60.83,13.21 48.89,13.21 45.64,16.46 45.64,18.19
XD5  (1 unrouted)
  Top 0.203: U3.19 66.8,20.32 60.2,13.72 49.15,13.72 46.15,16.71 46.15,18.19
XD6  (1 unrouted)
  Top 0.203: U3.20 66.8,21.59 59.44,14.22 49.4,14.22 46.66,16.97 46.66,18.19
XD7  (1 unrouted)
  Top 0.203: U3.21 66.8,22.86 58.67,14.73 49.66,14.73 47.65,16.74 47.65,18.19

## Text on the board
tPlace: Hark0 | mcleod_ideafix | antoniovillena | superfo
bPlace: 1